# Altium PCB LeftBar2_PcbDoc.PcbDoc
Units mil, origin at the board's own origin, x right, y up, seen from the top; angles counter-clockwise.
Board outline 12600 x 1400 mil, 2 copper layers (Top Layer, Bottom Layer); 8 components, 10 nets, 60 pads, 12 vias.
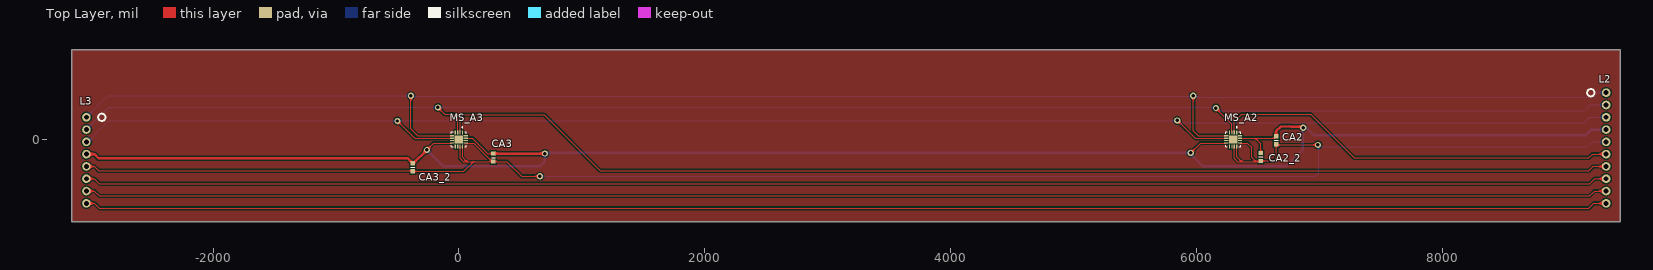
[diagram p0: Top Layer view]
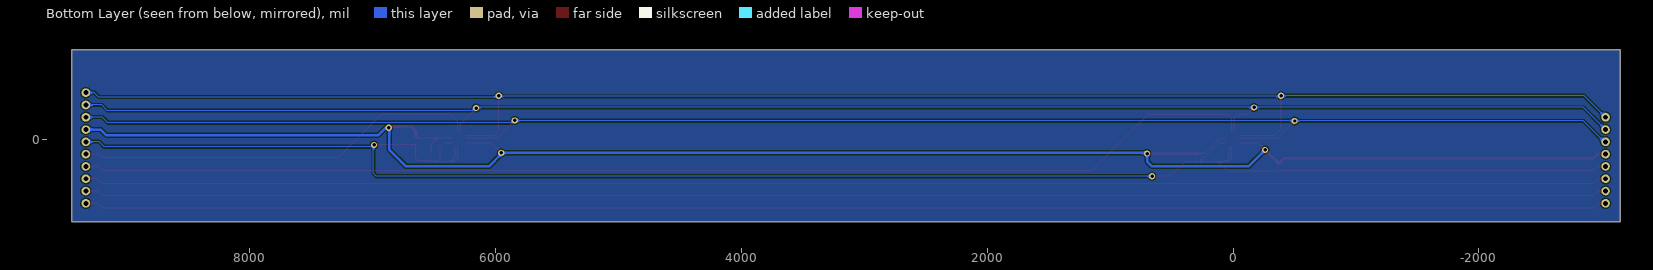
[diagram p1: Bottom Layer view, seen from below]
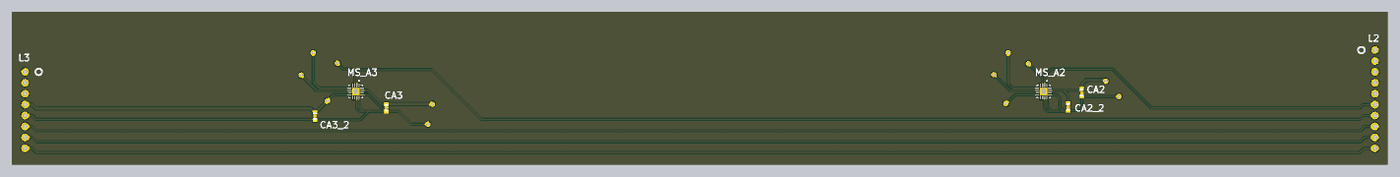
[diagram p2: 3D render of the assembled board from above, using the file's embedded part models]

## Layer stack, top to bottom
Top Solder: solder mask 0.4, Solder Resist, Dk 3.5
Top Layer: signal copper 1.4
Dielectric 1: dielectric 12.6, FR-4, Dk 4.8
Bottom Layer: signal copper 1.4
Bottom Solder: solder mask 0.4, Solder Resist, Dk 3.5

## Board outline
-3150,-670 -3150,730 9450,730 9450,-670

## Design rules (kind name [scope] priority, off if disabled: settings)
Clearance [All] p1: gap=10 ignorepadtopadclearanceinfootprint=FALSE except(0: Arc-Hole Track-Hole SMDPad-Hole THPad-Hole Via-Hole Fill-Hole Poly-Hole Region-Hole Text-Hole)
PolygonConnect [All] p1: connectstyle=Relief reliefconductorwidth=10 reliefentries=4 polygonreliefangle="90 Angle" airgapwidth=10
RoutingVias [All] p1: holewidth=28 width=50 viastyle="Through Hole" minholewidth=28 minwidth=50 maxholewidth=28 maxwidth=50
SolderMaskExpansion [All] p1: expansion=4 istentingtop=FALSE
Width [All] p1: maxlimit=10 minlimit=10 preferedwidth=10
30 further rules are at their usual default settings.

## Components (designator, comment, footprint, x,y, rotation, side; value= is the part's Value field where it differs from the comment)
CA2 "0.1uF" CAP_0603 6650,-7.5 r90 top
CA2_2 "0.1uF" CAP_0603 6525,-142.5 r270 top
CA3 "0.1uF" CAP_0603 280,-147.5 r90 top
CA3_2 "0.1uF" CAP_0603 -375,-227.5 r270 top
L2 "PIN_left_2" PIN_Left_2 9335,-120 r0 top (schematic designator CON_L_2)
L3 "PIN_left" PIN_LEFT_3 -3030,-320 r0 top (schematic designator CON_L_3)
MS_A2 "MLX90393SLW ABA 011 RE" MLX90393 6300,0 r270 top
MS_A3 "MLX90393SLW ABA 011 RE" MLX90393 0,0 r270 top

## Footprints (in the part's own frame and the unit in brackets; to place one, negate y for a bottom-side part, rotate by r counter-clockwise, add the part's x,y. Pads: shape width x height; smd on the part's side, far side on the other; paste and mask are expansions set on the pad)
CAP_0603 [mil]
  rect 35x35 smd: 1(-32.5,0) 2(32.5,0)
  silkscreen extent 0,-16 0,14, body extent -53,-18 49,21, height 35
MLX90393 [mm]
  rrect25% 0.86x0.26 smd: 1(-1.435,0.75) 2(-1.435,0.25) 3(-1.435,-0.25) 4(-1.435,-0.75) 9(1.435,-0.75) 10(1.435,-0.25) 11(1.435,0.25) 12(1.435,0.75)
  rrect25% 0.26x0.86 smd: 5(-0.75,-1.435) 6(-0.25,-1.435) 7(0.25,-1.435) 8(0.75,-1.435) 13(0.75,1.435) 14(0.25,1.435) 15(-0.25,1.435) 16(-0.75,1.435)
  rect 1.71x1.71 smd paste-2: 17(0,0)
  silkscreen extent -2.59,-1.55 1.55,1.55
PIN_Left_2 [mil]
  round 70 hole 40: 1(0,500) 2(0,400) 3(0,300) 4(0,200) 5(0,100) 6(0,0) 7(0,-100) 8(0,-200) 9(0,-300) 10(0,-400)
  silkscreen extent -155,470 -95,530
PIN_LEFT_3 [mil]
  round 70 hole 40: 1(0,500) 2(0,400) 3(0,300) 4(0,200) 5(0,100) 6(0,0) 7(0,-100) 8(0,-200)
  silkscreen extent 95,470 155,530

## Part data
CA2 CA2_2 CA3 CA3_2: library part CAP, "Capacitance"
L3: library part PIN_left_3
MS_A2 MS_A3: "MLX90393 Sensor"

## Via types
v1: diameter 50, hole 28, Top Layer to Bottom Layer, 12 vias

## Nets (pads, with @x,y where several pads share a name; then routed paths per layer and width w, separated by ;. In a path a pad name is that pad's centre, name@x,y a point inside that pad or via, vN(x,y) a via of type N, cw(c..) or ccw(c..) an arc to the next point about the centre after c; other vN are vias at no path point)
16: L2.10 L3.8 | length 12398.1
  Top Layer w10: L3.8 -2965,-520 -2925,-560 9195,-560 9235,-520 L2.10
A2: L2.6 MS_A2.2 | length 3297.7
  Top Layer w10: MS_A2.2@6310.28,56.5 6310.28,145.28 6370,205 6930,205 7285,-150 9195,-150 9225,-120 L2.6
A3: L2.7 MS_A3.2 | length 9656.9
  Top Layer w10: MS_A3.2 9.84,174.84 35,200 695,200 1150,-255 9195,-255 9230,-220 L2.7
A4: L2.8 L3.6 | length 12398.1
  Top Layer w10: L3.6 -2965,-320 -2925,-360 9200,-360 9240,-320 L2.8
A5: L2.9 L3.7 | length 12398.1
  Top Layer w10: L3.7 -2965,-420 -2925,-460 9200,-460 9240,-420 L2.9
GND: CA2.1 CA2_2.2 CA3.1 CA3_2.2 L2.5 L3.5 MS_A2.11 MS_A2.12 MS_A2.13 MS_A3.11 MS_A3.12 MS_A3.13 | length 14652.9
  Top Layer w10: L3.5 -2965,-220 -2930,-255 -380,-255 CA3_2.2 40,-260 120,-180 ; MS_A3.11 9.84,-154.84 35,-180 65,-180 ; MS_A3.12 29.53,-68.31 29.65,-68.43 29.96,-68.43 30,-68.46 30,-145 65,-180 ; MS_A3.13 119.53,-29.53 CA3.1@270,-180 ; v1(660,-300) 510,-300 390,-180 CA3.1 CA3.1@270,-180 ; MS_A2.11 6309.84,-154.84 6335,-180 6370,-180 ; MS_A2.12 6329.53,-139.53 6370,-180 ; MS_A2.13 6414.53,-29.53 6450,-65 6450,-145 6485,-180 ; CA2_2.2@6525,-180 6485,-180 ; CA2_2.2 6630,-175 6650,-155 CA2.1 6655,-45 v1(6990,-45) ; 65,-180 120,-180 ; 120,-180 CA3.1@270,-180 ; 6370,-180 6485,-180
  Bottom Layer w10: v1(660,-300) 6970,-300 6995,-275 v1@6995,-50 ; v1(6990,-45) v1@6995,-50 ; L2.5 9225,-20 9185,-60 7015.82,-60 7005.82,-50 v1@6995,-50
MISO: L2.3 L3.3 MS_A2.6 MS_A3.6 | length 13424.2
  Top Layer w10: v1(-500,150) -360.28,10.28 MS_A3.6@-56.5,10.28 ; v1(5845,155) 5989.72,10.28 MS_A2.6@6243.5,10.28
  Bottom Layer w10: L3.3 -3020,-20 -2850,150 v1(-500,150) -497.5,152.5 5842.5,152.5 v1(5845,155) 5855.82,155 5875.82,135 9155,135 9200,180 L2.3
MOSI: L2.1 L3.1 MS_A2.5 MS_A3.5 | length 13661.4
  Top Layer w10: v1(-390,355) -390,85.28 -335,30.28 MS_A3.5@-56.5,30.28 ; v1(5975,355) 5975,70.28 6015,30.28 MS_A2.5@6243.5,30.28
  Bottom Layer w10: L3.1@-3033.75,176.25 -2855,355 v1(-390,355) -385,350 5970,350 v1(5975,355) 5985.82,355 5995.82,345 9230,345 9265,380 L2.1
SCL: L2.2 L3.2 MS_A2.3 MS_A3.3 | length 13034.1
  Top Layer w10: v1(-170,260) -115,205 -45,205 -10.28,170.28 MS_A3.3@-10.28,56.5 ; v1(6160,255) 6289.72,125.28 MS_A2.3@6289.72,56.5
  Bottom Layer w10: L3.2@-3031.87,78.13 -2850,260 v1(-170,260) 6155,260 v1(6160,255) 6170.82,255 6190.82,235 9160,235 9205,280 L2.2
VCC: CA2.2 CA2_2.1 CA3.2 CA3_2.1 L2.4 L3.4 MS_A2.8 MS_A2.15 MS_A3.8 MS_A3.15 | length 14898.3
  Top Layer w10: v1(-260,-85) -204.53,-29.53 MS_A3.8 ; MS_A3.15@70,10.28 109.8,10.28 235.08,-115 CA3.2 ; v1(5955,-110) 6035.47,-29.53 MS_A2.8 ; MS_A2.15 6480.16,9.84 ; CA2_2.1 6525,-35 6480.16,9.84 ; CA2.2 6634.84,9.84 6480.16,9.84
  Top Layer w20: L3.4 -2965,-120 -2930,-155 -415,-155 CA3_2.1 ; CA3_2.1@-372.5,-197.5 v1(-260,-85) ; CA3.2 v1(700,-115) ; CA2.2 6650,67.07 6687.93,105 6773.9,105 6774.17,104.73 6860.27,104.73 v1(6870,95)
  Bottom Layer w10: v1(700,-115) 695,-110 v1@700,-110 ; v1@5955,-120 v1(5955,-110) ; v1(6870,95) 6875,100 6875,105 v1@6885,105
  Bottom Layer w20: v1(-260,-85) -125,-220 660,-220 700,-180 v1(700,-115) ; v1@700,-110 v1(5955,-110) ; v1@5955,-120 6055,-220 6730,-220 6865,-85 6865,90 v1(6870,95) 6875,95 6885,105 6955,35 9170,35 9215,80 L2.4
pads on no net: MS_A2.1 MS_A2.4 MS_A2.7 MS_A2.9 MS_A2.10 MS_A2.14 MS_A2.16 MS_A2.17 MS_A3.1 MS_A3.4 MS_A3.7 MS_A3.9 MS_A3.10 MS_A3.14 MS_A3.16 MS_A3.17

## Polygon pours and split planes (outlines as drawn)
no net on Top Layer "NONET_L01_P009" (solid, pour order 9): -3150,730 9450,730 9450,-670 -3150,-670
no net on Top Layer "NONET_L01_P008" (solid, pour order 8): -3150,-665
no net on Top Layer "NONET_L01_P007" (solid, pour order 7): -3150,-665
no net on Top Layer "NONET_L01_P001" (solid, pour order 1): -3065,740
no net on Bottom Layer "NONET_L02_P010" (solid, pour order 10): -3150,730 -3150,-670 9450,-670 9450,730 -3150,730
no net on Bottom Layer "NONET_L02_P006" (solid, pour order 6): -3150,730 -3150,-665
no net on Bottom Layer "NONET_L02_P005" (solid, pour order 5): -3150,-665
no net on Bottom Layer "NONET_L02_P002" (solid, pour order 2): -3150,660

## Silkscreen, mask and mechanical layers (free items; w line width, h text height)
Mechanical 1:
  lines w10: -3150,-670 -3150,730 6745.94,730 9450,730 9450,-670 -3150,-670